# EAGLE board Switch circuits program (EAGLE 9.7.0)

Size 170.95 x 59.69 mm. Coordinates in mm from the lower left corner, seen from the top.
Outline: 0,0 170.95,0 170.95,59.69 0,59.69 0,0
Copper layers (1*16): Top 0.035mm / dielectric 1.5mm / Bottom 0.035mm
Design rules "default": minimum track width 6mil, minimum drill 0.35mm, track to track 6mil, track to pad 6mil, pad to pad 6mil, via to via 6mil, smd to smd 6mil, copper to edge 40mil, drill to drill 6mil, minimum pad ring 10mil, minimum via ring 8mil, stop-mask expansion 4mil, vias tented up to drill 0mil, thermal gap 10mil

## Footprints (pad centres in the part's own frame; a part is rotated, then mirrored left to right if it is on the bottom)
LEDRD254W60D565H860B_G = drill 0.981 pad 1.581: 1 -1.27,0; 2 1.27,0
LEDRD254W60D565H860B = drill 0.981 pad 1.581: 1 -1.27,0; 2 1.27,0
LEDRD254W60D565H860B_Y = drill 0.981 pad 1.581: 1 -1.27,0; 2 1.27,0
RESAD1016W63L850D250B = drill 0.83 pad 1.43: 1 -5.08,0; 2 5.08,0
SWITCH-MOMENTARY-PTH-6.5MM = drill 1.016 pad 1.88: 1 -3.251,2.261; 2 3.251,2.261; 3 -3.251,-2.261; 4 3.251,-2.261
ARDUINO-UNO-R3-SHIELD = drill 1.016 pad 1.88: 3.3V 24.13,-2.54; 5V 24.13,0; A0 24.13,12.7; A1 24.13,15.24; A2 24.13,17.78; A3 24.13,20.32; A4 24.13,22.86; A5 24.13,25.4; AREF -24.13,-13.97; D2 -24.13,20.32; D3 -24.13,17.78; D4 -24.13,15.24; D5 -24.13,12.7; D6 -24.13,10.16; D7 -24.13,7.62; D8 -24.13,3.81; D9 -24.13,1.27; D10 -24.13,-1.27; D11 -24.13,-3.81; D12 -24.13,-6.35; D13 -24.13,-8.89; GND@0 24.13,2.54; GND@1 24.13,5.08; GND@2 -24.13,-11.43; IOREF 24.13,-7.62; NC 24.13,-10.16; RES 24.13,-5.08; RX -24.13,25.4; SCL -24.13,-19.05; SDA -24.13,-16.51; TX -24.13,22.86; VIN 24.13,7.62

## Placement (x,y rotation side)
D1  GREEN  [LEDRD254W60D565H860B_G]  102.39,18.17 180 top
D2  GREEN  [LEDRD254W60D565H860B_G]  125.25,18.17 180 top
D3  RED  [LEDRD254W60D565H860B]  130.33,18.17 180 top
D4  YELLOW  [LEDRD254W60D565H860B_Y]  145.57,18.17 180 top
D5  RED  [LEDRD254W60D565H860B]  163.35,18.17 180 top
R1  10k  [RESAD1016W63L850D250B]  93.5,46.11 90 top
R2  470  [RESAD1016W63L850D250B]  103.66,30.87 90 top
R3  10k  [RESAD1016W63L850D250B]  108.74,46.11 90 top
R4  470  [RESAD1016W63L850D250B]  126.52,30.87 90 top
R5  10k  [RESAD1016W63L850D250B]  116.36,46.11 90 top
R6  470  [RESAD1016W63L850D250B]  131.6,30.87 90 top
R7  10k  [RESAD1016W63L850D250B]  136.68,46.11 90 top
R8  1k  [RESAD1016W63L850D250B]  146.84,28.33 90 top
R9  470  [RESAD1016W63L850D250B]  164.62,30.87 90 top
R10  10k  [RESAD1016W63L850D250B]  154.46,46.11 90 top
S1  SWITCH_MOMENTARY  [SWITCH-MOMENTARY-PTH-6.5MM]  96.04,29.6 90 top
S3  SWITCH_MOMENTARY  [SWITCH-MOMENTARY-PTH-6.5MM]  111.28,29.6 90 top
S4  SWITCH_MOMENTARY  [SWITCH-MOMENTARY-PTH-6.5MM]  118.9,29.6 90 top
S5  SWITCH_MOMENTARY  [SWITCH-MOMENTARY-PTH-6.5MM]  139.22,29.6 90 top
S6  SWITCH_MOMENTARY  [SWITCH-MOMENTARY-PTH-6.5MM]  157,29.6 90 top
U1  ARDUINO-UNO-R3-SHIELD  [ARDUINO-UNO-R3-SHIELD]  47.88,29.84 270 top

## Library data of the parts
D1 D2 = Tinkercad; CATEGORY: Opto-Electronic; SUB-CATEGORY: LED; VALUE: LED_GREEN
D3 D5 = Tinkercad; CATEGORY: Opto-Electronic; SUB-CATEGORY: LED; VALUE: LED_RED
D4 = Tinkercad; CATEGORY: Opto-Electronic; SUB-CATEGORY: LED; VALUE: LED_YELLOW
R1-R10 S1 S3-S6 U1 = Tinkercad

## Nets
D1_A: D1.1 R2.1
D2_A: D2.1 R4.1
D3_A: D3.1 R6.1
D4_A: D4.1 R8.1
D5_A: D5.1 R9.1
U1_5V: R1.2 R3.2 R5.2 R7.2 R10.2 U1.5V
U1_D2: R2.2 U1.D2
U1_D3: R4.2 U1.D3
U1_D4: R6.2 U1.D4
U1_D5: R8.2 U1.D5
U1_D6: R9.2 U1.D6
U1_D8: R5.1 S4.1 S4.2 U1.D8
U1_D9: R3.1 S3.1 S3.2 U1.D9
U1_D10: R1.1 S1.1 S1.2 U1.D10
U1_D11: R7.1 S5.1 S5.2 U1.D11
U1_D12: R10.1 S6.1 S6.2 U1.D12
U1_GND: D1.2 D2.2 D3.2 D4.2 D5.2 S1.3 S1.4 S3.3 S3.4 S4.3 S4.4 S5.3 S5.4 S6.3 S6.4 U1.GND@0 U1.GND@1 U1.GND@2

## Tracks (layer width: path | path; a pad name or v marks a point on that pad's centre or on a via)
D1_A  (1 unrouted)
D2_A  (1 unrouted)
D3_A  (1 unrouted)
D4_A  (1 unrouted)
D5_A  (1 unrouted)
U1_5V  (5 unrouted)
U1_D2  (1 unrouted)
U1_D3  (1 unrouted)
U1_D4  (1 unrouted)
U1_D5  (1 unrouted)
U1_D6  (1 unrouted)
U1_D8  (3 unrouted)
U1_D9  (3 unrouted)
U1_D10  (3 unrouted)
U1_D11  (3 unrouted)
U1_D12  (3 unrouted)
U1_GND  (17 unrouted)